# EAGLE board touringmach0_front (EAGLE 9.5.0)
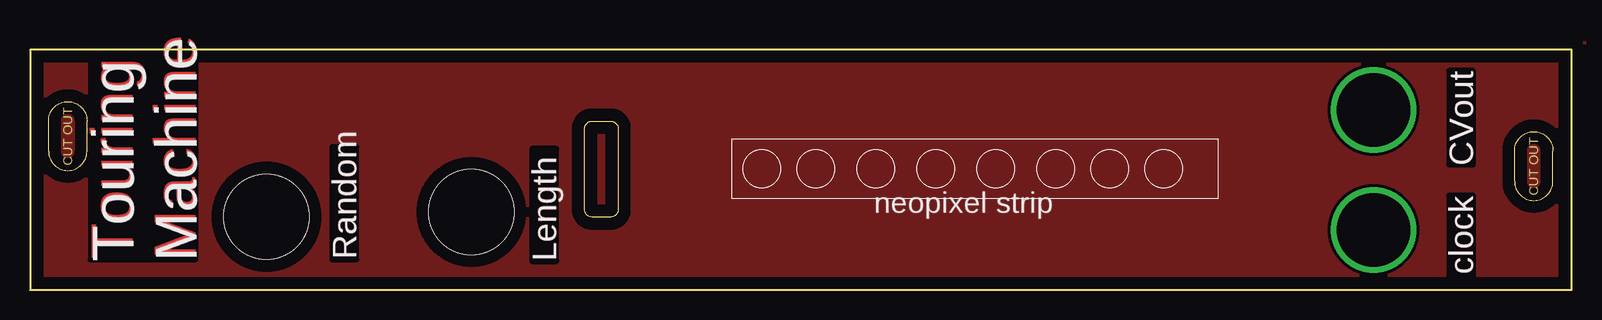
[diagram p0: board, top side]

Size 128.5 x 20 mm. Coordinates in mm from the lower left corner, seen from the top.
Outline: 0,0 128.5,0 128.5,20 0,20 0,0
Outline: 1.55,11.55 1.55,14.09 arc-180 4.75,14.09 4.75,11.55 arc-180 1.55,11.55
Outline: 123.75,9.05 123.75,11.59 arc-180 126.95,11.59 126.95,9.05 arc-180 123.75,9.05
Outline: 49.03,13.44 49.03,6.71 arc-90 48.4,6.07 46.87,6.07 arc-90 46.23,6.71 46.23,13.44 arc-90 46.87,14.07 48.4,14.07 arc-90 49.03,13.44
Copper layers (1*16): Top 0.035mm / dielectric 1.5mm / Bottom 0.035mm
Design rules "default": minimum track width 6mil, minimum drill 0.35mm, track to track 6mil, track to pad 6mil, pad to pad 6mil, via to via 6mil, smd to smd 6mil, copper to edge 40mil, drill to drill 6mil, minimum pad ring 10mil, minimum via ring 8mil, stop-mask expansion 4mil, vias tented up to drill 0mil, thermal gap 10mil

## Footprints (pad centres in the part's own frame; a part is rotated, then mirrored left to right if it is on the bottom)
PANEL_THONK_SOCKET = drill 6.1: P$1 0,0
PANEL_SHAFT_POT = hole 7.1: 0,0

## Placement (x,y rotation side)
E$1  [PANEL_THONK_SOCKET]  112,15 0 top
E$2  [PANEL_SHAFT_POT]  19.7,6.1 0 top
E$3  [PANEL_SHAFT_POT]  36.8,6.5 0 top
E$4  [PANEL_THONK_SOCKET]  112,5 0 top

## Library data of the parts
E$1-E$4 = MusicThingModular

## Tracks (layer width: path | path; a pad name or v marks a point on that pad's centre or on a via)
GND
  pour Top (isolate 0.254): 0.23,20.67 129.53,20.67 129.53,-0.63 0.23,-0.63

## Text on the board
Top: CVout | clock | Touring / Machine | Random | Length
Dimension: CUT OUT | CUT OUT
tPlace: TrinketM0 | touringmach0 / @todbot / 7Sep2019 | CVout | clock | neopixel strip | Random | Touring / Machine | Length